# Altium PCB PCB_ControlBoard.PcbDoc
Units mil, origin at the board's own origin, x right, y up, seen from the top; angles counter-clockwise.
Board outline 2170 x 1181.1 mil, 2 copper layers (Top Layer, Bottom Layer); 22 components, 134 nets, 74 pads, 0 vias.
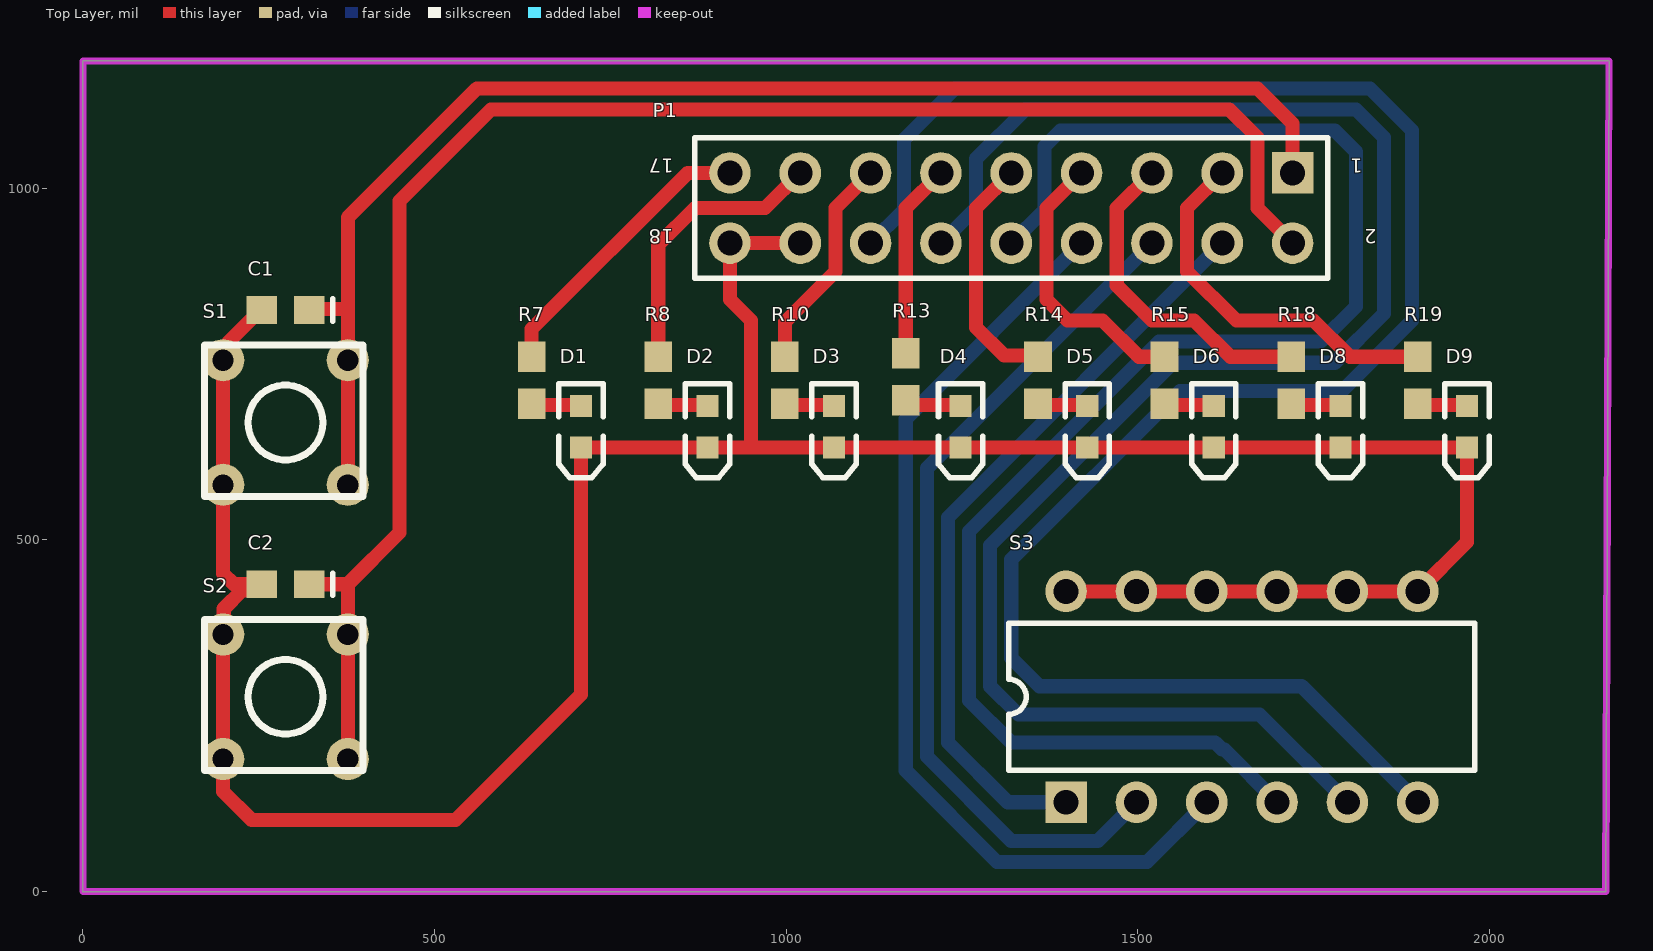
[diagram p0: Top Layer view]
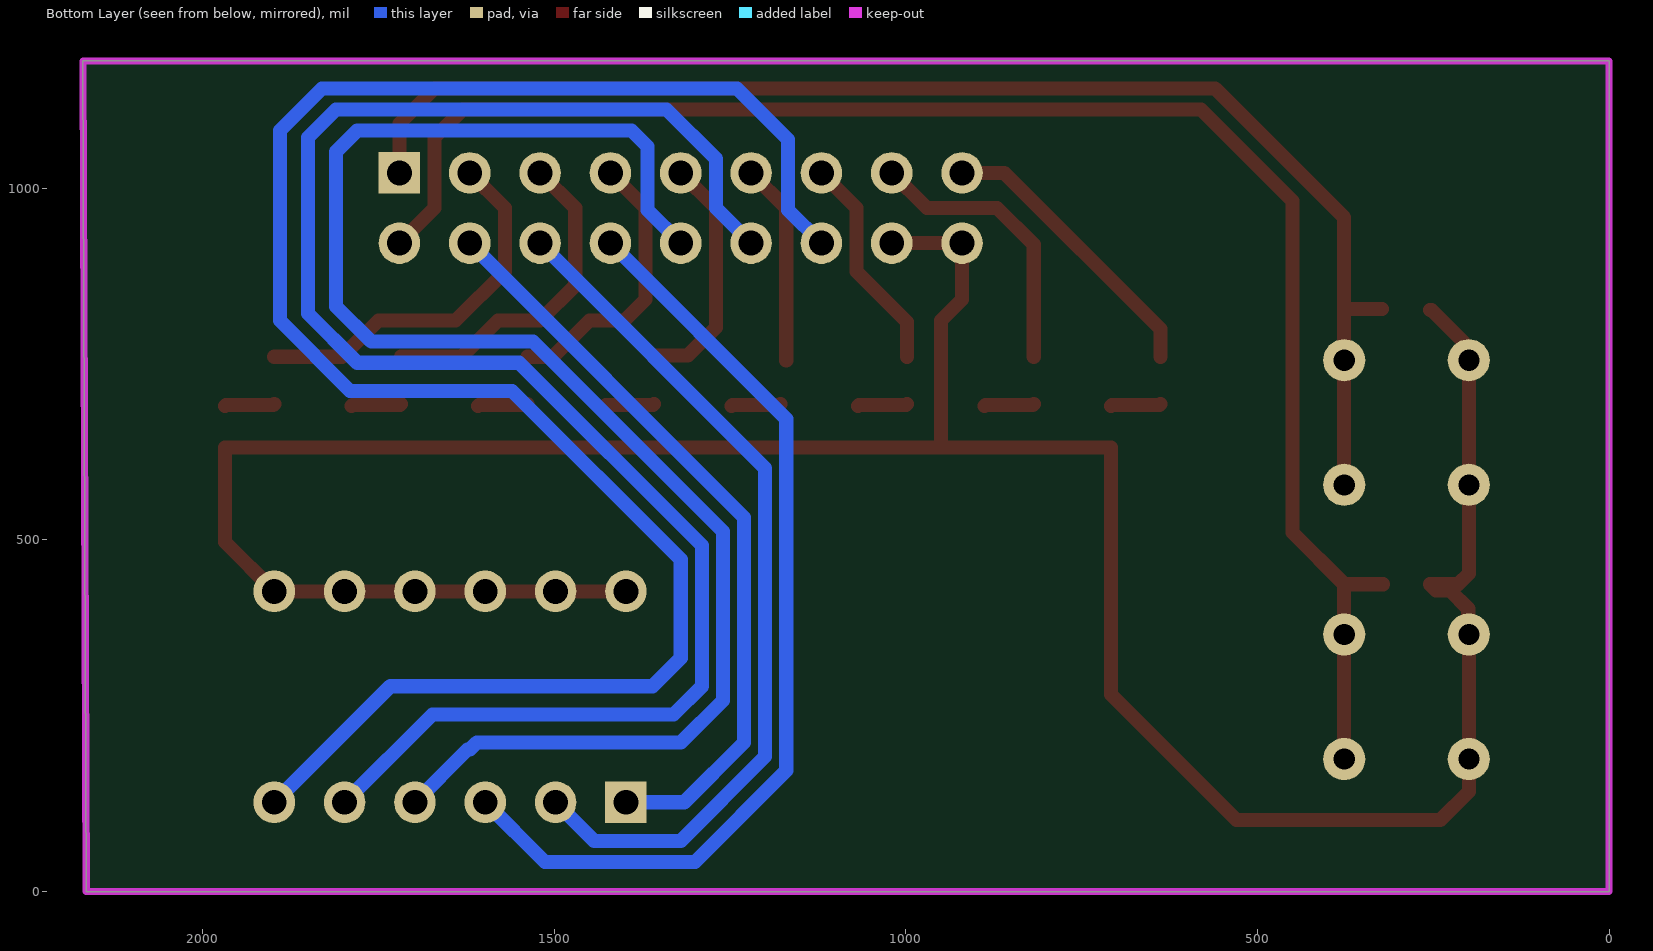
[diagram p1: Bottom Layer view, seen from below]

## Layer stack, top to bottom
Top Solder: solder mask 0.4, Solder Resist, Dk 3.5
Top Layer: signal copper 1.4
Dielectric 1: dielectric 12.6, FR-4, Dk 4.8
Bottom Layer: signal copper 1.4
Bottom Solder: solder mask 0.4, Solder Resist, Dk 3.5

## Board outline
0,0 2165.34,0 2170,1181.1 0,1181.1

## Design rules (kind name [scope] priority, off if disabled: settings)
BoardOutlineClearance [All] p1: gap=11.81 ignorepadtopadclearanceinfootprint=FALSE except(15.75: Arc-SplitBarrior Arc-SplitContinuation Track-SplitBarrior Track-SplitContinuation SMDPad-SplitBarrior SMDPad-SplitContinuation THPad-SplitBarrior THPad-SplitContinuation Via-SplitBarrior Via-SplitContinuation Fill-SplitBarrior Fill-SplitContinuation Poly-SplitBarrior Poly-SplitContinuation Region-SplitBarrior Region-SplitContinuation Text-SplitBarrior Text-SplitContinuation)
Clearance "Clearance Different Nets" [All] p1: gap=10 ignorepadtopadclearanceinfootprint=FALSE except(3.5: Arc-Arc Arc-Track Arc-SMDPad Track-Track Track-SMDPad; 5: SMDPad-SMDPad SMDPad-Via THPad-Via Via-Via; 7.87: Arc-THPad Arc-Hole Track-THPad Track-Hole SMDPad-THPad SMDPad-Hole THPad-Hole Fill-Hole Poly-Hole Region-Hole Text-Hole; 19.68: THPad-THPad Via-Hole)
Clearance "Clearance Same Nets" [All] p2: gap=10 ignorepadtopadclearanceinfootprint=FALSE except(3.5: Arc-Arc Arc-Track Arc-SMDPad Track-Track Track-SMDPad SMDPad-SMDPad; 5: SMDPad-Via THPad-Via; 7.87: Arc-THPad Arc-Hole Track-THPad Track-Hole SMDPad-THPad SMDPad-Hole THPad-THPad THPad-Hole Via-Hole Fill-Hole Poly-Hole Region-Hole Text-Hole)
Clearance "Clearance Bottom Layer" [OnLayer('Bottom Layer')] p3: gap=10 ignorepadtopadclearanceinfootprint=TRUE except(8: Arc-Arc Arc-Track Arc-SMDPad Arc-THPad Arc-Via Arc-Hole Track-Track Track-SMDPad Track-THPad Track-Via Track-Hole SMDPad-SMDPad SMDPad-THPad SMDPad-Via SMDPad-Hole THPad-THPad THPad-Via THPad-Hole Via-Via Via-Hole Fill-Hole Poly-Hole Region-Hole Text-Hole)
Clearance "Clearance Top Layer" [OnLayer('Top Layer')] p4: gap=10 ignorepadtopadclearanceinfootprint=TRUE except(8: Arc-Arc Arc-Track Arc-SMDPad Arc-THPad Arc-Via Arc-Hole Track-Track Track-SMDPad Track-THPad Track-Via Track-Hole SMDPad-SMDPad SMDPad-THPad SMDPad-Via SMDPad-Hole THPad-THPad THPad-Via THPad-Hole Via-Via Via-Hole Fill-Hole Poly-Hole Region-Hole Text-Hole)
HoleSize [All] p1: absolutevalues=TRUE maxlimit=248.03 minlimit=7.87 maxpercent=80.000 minpercent=20.000
MinimumAnnularRing [All] p1: minimumring=5.12
MinimumSolderMaskSliver [All] p1: minsoldermaskwidth=3.94
PolygonConnect PolygonConnect_1 [All] p1: thpad.connectstyle=Relief thpad.reliefconductorwidth=20 thpad.reliefentries=4 thpad.polygonreliefangle="90 Angle" thpad.airgapwidth=10 smdpad.connectstyle=Relief smdpad.reliefconductorwidth=20 smdpad.reliefentries=4 smdpad.polygonreliefangle="90 Angle" smdpad.airgapwidth=10 via.connectstyle=Direct via.reliefconductorwidth=20 via.reliefentries=4 via.polygonreliefangle="90 Angle" via.airgapwidth=10
RoutingCorners [All] p1: cornerstyle=Round minsetback=100 maxsetback=100
RoutingVias [All] p1: holewidth=19.68 width=39.37 viastyle="Through Hole" minholewidth=7.87 minwidth=13.78 maxholewidth=39.37 maxwidth=78.74
SilkToSilkClearance [All] p1: silktosilkclearance=3.94
SilkToSolderMaskClearance [IsPad] p1: minsilkscreentomaskgap=3.94 clearancetoexposedcopper=TRUE
SolderMaskExpansion [All] p1: expansion=4 istentingtop=FALSE
Width [All] p1: maxlimit=100 minlimit=3.5 preferedwidth=15
25 further rules are at their usual default settings.

## Components (designator, comment, footprint, x,y, rotation, side; value= is the part's Value field where it differs from the comment)
C1 "" 0603 288,827 r180 top value=100nF
C2 "" 0603 288,437 r180 top value=100nF
D1 "CH 1" 1.6X0.8X0.8 708,661.09 r270 top
D2 "CH 2" 1.6X0.8X0.8 888,661.09 r270 top
D3 "CH 3" 1.6X0.8X0.8 1068,661.09 r270 top
D4 "CH 4" 1.6X0.8X0.8 1248,661.09 r270 top
D5 "CH5" 1.6X0.8X0.8 1428,661.09 r270 top
D6 "CH6" 1.6X0.8X0.8 1608,661.09 r270 top
D8 "CH7" 1.6X0.8X0.8 1788,661.09 r270 top
D9 "CH8" 1.6X0.8X0.8 1968,661.09 r270 top
P1 "Header 9X2" HDR2X9 1720,1022 r180 top
R7 "2K2" ERA-0603 638,727 r270 top
R8 "2K2" ERA-0603 818,727 r270 top
R10 "2K2" ERA-0603 998,727 r270 top
R13 "2K2" ERA-0603 1170,732 r270 top
R14 "2K2" ERA-0603 1358,727 r270 top
R15 "2K2" ERA-0603 1538,727 r270 top
R18 "2K2" ERA-0603 1718,727 r270 top
R19 "2K2" ERA-0603 1898,727 r270 top
S1 "> >" TACTILE_SWITCH 288,667 r180 top
S2 "ON_OFF" TACTILE_SWITCH 288,277 r180 top
S3 "SW DIP-6" DIP-12/SW 1648,277 r0 top

## Footprints (in the part's own frame and the unit in brackets; to place one, negate y for a bottom-side part, rotate by r counter-clockwise, add the part's x,y. Pads: shape width x height; smd on the part's side, far side on the other; paste and mask are expansions set on the pad)
1.6X0.8X0.8 [mm] "SM LED; 2 Flat Leads"
  rect 0.8x0.8 smd: 1(-0.75,0) 2(0.75,0)
  silkscreen extent -1.55,-0.8 1.85,0.8
0603 [mm] "Chip Capacitor; Body 1.6 x 0.8 mm (LxW typ)"
  rect 1.1x1 smd: 1(-0.85,0) 2(0.85,0)
  silkscreen extent -1.7,-0.4 -1.7,0.4
DIP-12/SW [mm] "DIP Switch; 12 Leads"
  rect 1.5x1.5 hole 0.9: 1(-6.35,-3.81)
  round 1.5 hole 0.9: 2(-3.81,-3.81) 3(-1.27,-3.81) 4(1.27,-3.81) 5(3.81,-3.81) 6(6.35,-3.81) 7(6.35,3.81) 8(3.81,3.81) 9(1.27,3.81) 10(-1.27,3.81) 11(-3.81,3.81) 12(-6.35,3.81)
  silkscreen extent -8.43,-2.65 8.41,2.65
ERA-0603 [mm] "Chip Resistor; Body 1.6 x 0.8 mm (LxW typ)"
  rect 1.1x1 smd: 1(-0.85,0) 2(0.85,0)
HDR2X9 [mm] "Connector; Header; 9x2 Position"
  rect 1.5x1.5 hole 0.9: 1(0,0)
  round 1.5 hole 0.9: 2(0,2.54) 3(2.54,0) 4(2.54,2.54) 5(5.08,0) 6(5.08,2.54) 7(7.62,0) 8(7.62,2.54) 9(10.16,0) 10(10.16,2.54) 11(12.7,0) 12(12.7,2.54) 13(15.24,0) 14(15.24,2.54) 15(17.78,0) 16(17.78,2.54) 17(20.32,0) 18(20.32,2.54)
  silkscreen extent -1.27,-1.27 21.59,3.81
TACTILE_SWITCH [mil] "PCB push button"
  round 60 hole 30: 1(-88.58,88.58) 2(88.58,88.58) 3(88.58,-88.58) 4(-88.58,-88.58)
  silkscreen extent -110,-110 115,105

## Part data
C1 C2: library part C0603, "Ceramic Chip Capacitor - Standard", PackageDocument=Mar-2001, Code_IPC="1608 [0603]", Code_JEITA=0603, ComponentLink1Description="Manufacturer Link", ComponentLink1URL=http://www.kemet.com/, ComponentLink2Description=Datasheet, ComponentLink2URL=http://www.kemet.com/kemet/web/homepage/kechome.nsf/vapubfilesname/F3102TA.pdf/$file/F3102TA.pdf, DatasheetDocument=Mar-2001, LatestRevisionDate=19-Mar-2004, LatestRevisionNote="Silkscreen size reduced.", Note="Footprint corresponds to dimensions for bulk cassette packaging. This case size has tightened tolerances.", PackageReference=0603, Published=17-Jul-2002, Publisher="Altium Limited"
D1 D2 D3 D4 D5 D6 D8 D9: library part HSMZ-C190, "High Performance Chip LED, Red", LED_Colour=Red, PackageDocument=11-Mar-2002, ComponentLink1Description="Manufacturer Link", ComponentLink1URL=http://www.agilent.com/, ComponentLink2Description=Datasheet, ComponentLink2URL=http://cp.literature.agilent.com/litweb/pdf/5988-5891EN.pdf, DatasheetDocument=11-Mar-2002, LuminousIntensity="40mcd (Minimum).", PackageReference=1.6X0.8X0.8, PCB_Layout="Complies with manufacturer's recommendation.", Published=11-Dec-2002, Publisher="Altium Limited"
P1: "Header, 9-Pin, Dual row", LatestRevisionDate=17-Jul-2002, LatestRevisionNote="Re-released for DXP Platform.", Publisher="Altium Limited"
R7 R8 R10 R13 R14 R15 R18 R19: library part ERA3Y, "Rectangular Thick Film Chip Resistor, 10 Ohm to 330k Ohm Range, 0.1% and 0.5% Tolerance, 0603 Size, 0.063 W", PackageDocument=Mar-2003, Code_IPC="1608 [0603]", ComponentLink1Description="Manufacturer Link", ComponentLink1URL=http://www.panasonic.com/industrial/components/resistive_products.htm, ComponentLink2Description=Datasheet, ComponentLink2URL=http://www.panasonic.com/industrial/components/pdf/AOA0000CE8.pdf, LatestRevisionDate=19-Mar-2004, LatestRevisionNote="Silkscreen size reduced.", Note="If flow soldering, adjust pad width of PCB Footprint to 0.7 - 0.8 times the width of the resistor.", PackageReference=ERA-0603, Published=17-Dec-2003, Publisher="Altium Limited"
S1 S2: library part TACKTILE_SWITCH
S3: "DIP Switch, 6 Position, SPST", LatestRevisionDate=17-Jul-2002, LatestRevisionNote="Re-released for DXP Platform.", PackageDescription="DIP Switch; 12 Leads", PackageReference=DIP-12/SW, Published=24-Mar-1999, Publisher="Altium Limited"

## Nets (pads, with @x,y where several pads share a name; then routed paths per layer and width w, separated by ;. In a path a pad name is that pad's centre, name@x,y a point inside that pad or via, vN(x,y) a via of type N, cw(c..) or ccw(c..) an arc to the next point about the centre after c; other vN are vias at no path point)
3V3: 
5V: 
12V: 
24V: 
+24_REL: 
+24_REL2: 
_COM1: 
_COM2: 
_COM3: 
_COM4: 
_COM5: 
_COM6: 
_COM7: 
_COM8: 
_NC1: 
_NC2: 
_NC5: 
_NC6: 
_NO1: 
_NO2: 
_NO3: 
_NO4: 
_NO5: 
_NO6: 
_NO7: 
_NO8: 
_REL1: 
_REL2: 
_REL3: 
_REL4: 
_REL5: 
_REL6: 
_REL7: 
_REL8: 
ADDRESS_0: 
ADDRESS_1: 
ADDRESS_2: 
ADDRESS_3: 
ADDRESS_4: 
ADDRESS_5: 
BUTTON_ON_OFF: 
BUTTON_SELECT: 
COM1: 
COM2: 
COM3: 
COM4: 
COM5: 
COM6: 
COM7: 
COM8: 
GND: 
I2C1_SCL: 
I2C1_SDA: 
LED_CH1: 
LED_CH2: 
LED_CH3: 
LED_CH4: 
LED_CH5: 
LED_CH6: 
LED_CH7: 
LED_CH8: 
NC1: 
NC2: 
NC5: 
NC6: 
NetC1_1: C1.1 P1.1 S1.1 S1.4 | length 1944.3
  Top Layer w20: C1.1@322.57,828.1 376.58,828.1 ; S1.1 S1.4 376.58,828.1 ; P1.1 1720,1092 1670,1142 560,1142 376.58,958.58 376.58,828.1
NetC1_2: C1.2 C2.2 D1.2 D2.2 D3.2 D4.2 D5.2 D6.2 D8.2 D9.2 P1.16 P1.18 S1.2 S1.3 S2.2 S2.3 S3.7 S3.8 S3.9 S3.10 S3.11 S3.12 | length 4135.8
  Top Layer w20: C1.2 252.57,827 207.07,781.5 207.07,763.24 S1.3 S1.2 199.42,452.58 215,437 C2.2 245.84,428.3 226.3,428.3 200.2,402.2 200.2,366.37 S2.3 S2.2 199.42,142.58 240,102 530,102 708,280 D1.2 D2.2 950,631.57 ; P1.16 P1.18 920,842 950,812 950,631.57 ; S3.12 S3.11 S3.10 S3.9 S3.8 S3.7 1968,497 D9.2 D8.2 D6.2 D5.2 D4.2 D3.2 950,631.57
NetC2_1: C2.1 P1.2 S2.1 S2.4 | length 2351.7
  Top Layer w20: C2.1 375,437 376.58,435.42 ; S2.4@368.93,373.24 S2.4 ; S2.1 S2.4 ; P1.2 1670,972 1670,1072 1630,1112 580,1112 450,982 450,510.42 376.58,437 376.58,391.5 376.58,373.24 S2.4
NetC8_1: 
NetC13_1: 
NetC13_2: 
NetD1_1: D1.1 R7.2 | length 71.2
  Top Layer w20: R7.2 639.46,692.08 706.54,692.08 D1.1
NetD2_1: D2.1 R8.2 | length 71.2
  Top Layer w20: R8.2 819.46,692.08 886.54,692.08 D2.1
NetD3_1: D3.1 R10.2 | length 71.2
  Top Layer w20: R10.2 999.46,692.08 1066.54,692.08 D3.1
NetD4_1: D4.1 R13.2 | length 71.2
  Top Layer w20: R13.2@1178,693.54 1179.46,692.08 1246.54,692.08 D4.1
NetD5_1: D5.1 R14.2 | length 71.2
  Top Layer w20: R14.2 1359.46,692.08 1426.54,692.08 D5.1
NetD6_1: D6.1 R15.2 | length 71.2
  Top Layer w20: R15.2 1539.46,692.08 1606.54,692.08 D6.1
NetD7_2: 
NetD8_1: D8.1 R18.2 | length 71.2
  Top Layer w20: R18.2 1719.46,692.08 1786.54,692.08 D8.1
NetD9_1: D9.1 R19.2 | length 71.2
  Top Layer w20: R19.2 1899.46,692.08 1966.54,692.08 D9.1
NetK3_21: 
NetK4_11: 
NetK7_21: 
NetK8_11: 
NetP1_3: P1.3 R19.1 | length 539.1
  Top Layer w20: P1.3 1570,972 1570,882 1640,812 1750,812 1801.54,760.46 R19.1
NetP1_4: P1.4 S3.1 | length 1074.8
  Bottom Layer w20: S3.1 1315,127 1230,212 1230,532 P1.4
NetP1_5: P1.5 R18.1 | length 470.8
  Top Layer w20: P1.5 1470,972 1470,862 1520,812 1580,812 1631.54,760.46 R18.1
NetP1_6: P1.6 S3.2 | length 1233
  Bottom Layer w20: S3.2 1443,72 1320,72 1200,192 1200,602 P1.6
NetP1_7: P1.7 R15.1 | length 402.5
  Top Layer w20: P1.7 1370,972 1370,842 1400,812 1450,812 1501.54,760.46 R15.1
NetP1_8: P1.8 S3.3 | length 1370.6
  Bottom Layer w20: P1.8 1170,672 1170,172 1300,42 1513,42 S3.3
NetP1_9: P1.9 R14.1 | length 345.9
  Top Layer w20: P1.9 1270,972 1270,802 1310,762 1356.46,762 R14.1
NetP1_10: P1.10 S3.4 | length 2262
  Bottom Layer w20: P1.10 1367.4,969.4 1367.4,1059.4 1390,1082 1780,1082 1810,1052 1810,832 1760,782 1530,782 1260,512 1260,272 1320,212 1610,212 1620,202 1623,202 S3.4
NetP1_11: P1.11 R13.1 | length 287.2
  Top Layer w20: R13.1@1170,755.46 1170,972 P1.11
NetP1_12: P1.12 S3.5 | length 2489.3
  Bottom Layer w20: P1.12 1270,972 1270,1042 1340,1112 1810,1112 1850,1072 1850,822 1780,752 1550,752 1290,492 1290,292 1330,252 1673,252 S3.5
NetP1_13: P1.13 R10.1 | length 312.1
  Top Layer w20: R10.1 998,810 1070,882 1070,972 P1.13
NetP1_14: P1.14 S3.6 | length 2728.3
  Bottom Layer w20: P1.14 1167.4,969.4 1167.4,1069.4 1240,1142 1830,1142 1890,1082 1890,812 1790,712 1560,712 1320,472 1320,332 1360,292 1733,292 S3.6
NetP1_15: P1.15 R8.1 | length 403.8
  Top Layer w20: R8.1 818,920 870,972 970,972 P1.15
NetP1_17: P1.17 R7.1 | length 413.5
  Top Layer w20: R7.1 638,800 860,1022 P1.17
NetP2_1: 
NetP2_2: 
NetR1_1: 
NetR3_2: 
NetR4_2: 
NetR5_2: 
NetR16_1: 
NO1: 
NO2: 
NO3: 
NO4: 
NO5: 
NO6: 
NO7: 
NO8: 
REL1: 
REL2: 
REL3: 
REL4: 
REL5: 
REL6: 
REL7: 
REL8: 
RELAY1: 
RELAY2: 
RELAY3: 
RELAY4: 
RELAY5: 
RELAY6: 
RELAY7: 
RELAY8: 
SWCLK: 
SWDIO: 
USART1_DE: 
USART1_RX: 
USART1_TX: 

## Keep-outs
Keep-Out Layer:
  lines w10: 2168,1181.1 0,1181.1 0,0 2165.34,0 2170,1181.1

## Text inside footprints (layer, text, board x,y; h text height)
P1: Top Overlay "18" at 840,942 h20 r180; Top Overlay "17" at 840,1042 h20 r180; Top Overlay "1" at 1820,1042 h20 r180; Top Overlay "2" at 1840,942 h20 r180